# Altium PCB STM32_BalanceCar.PcbDoc (part 1 of 2)
Units mil, origin at the board's own origin, x right, y up, seen from the top; angles counter-clockwise.
Board outline 2206.41 x 3228.35 mil, 4 copper layers (Top Layer, Mid-Layer 1, Mid-Layer 2, Bottom Layer); 124 components, 106 nets, 508 pads, 271 vias.
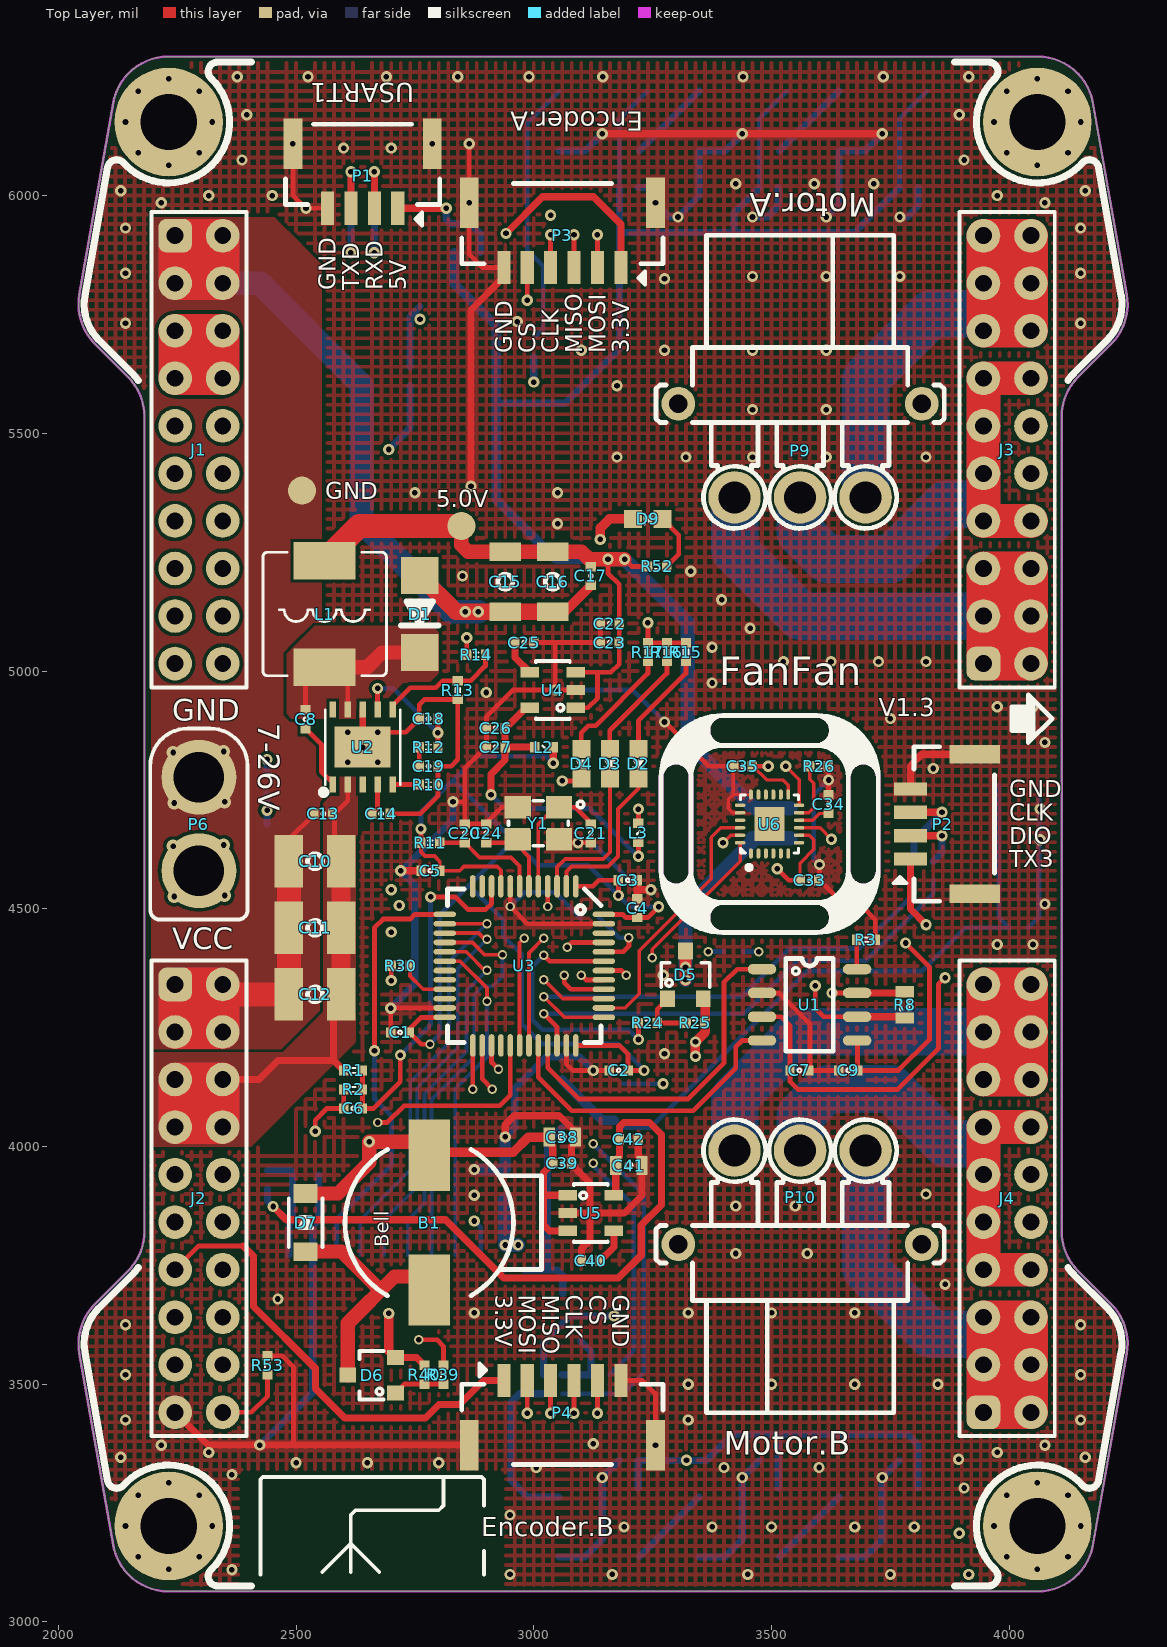
[diagram p0: Top Layer view]
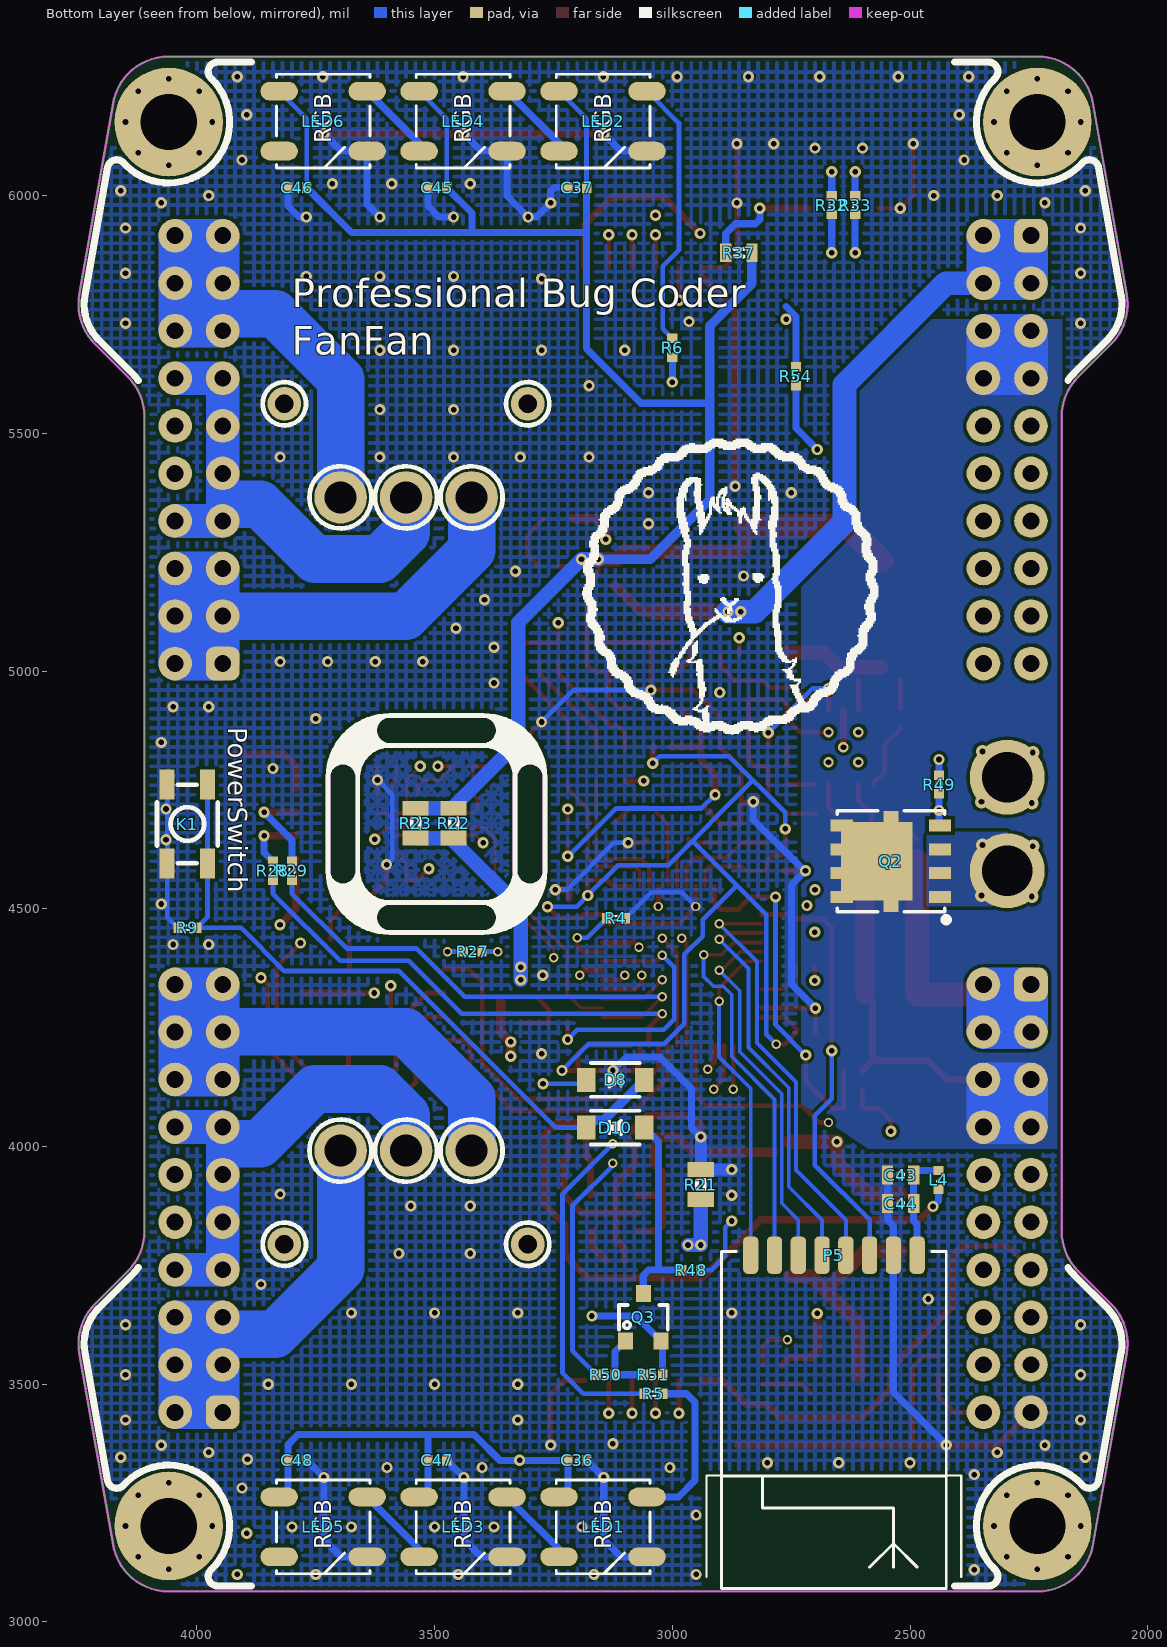
[diagram p1: Bottom Layer view, seen from below]
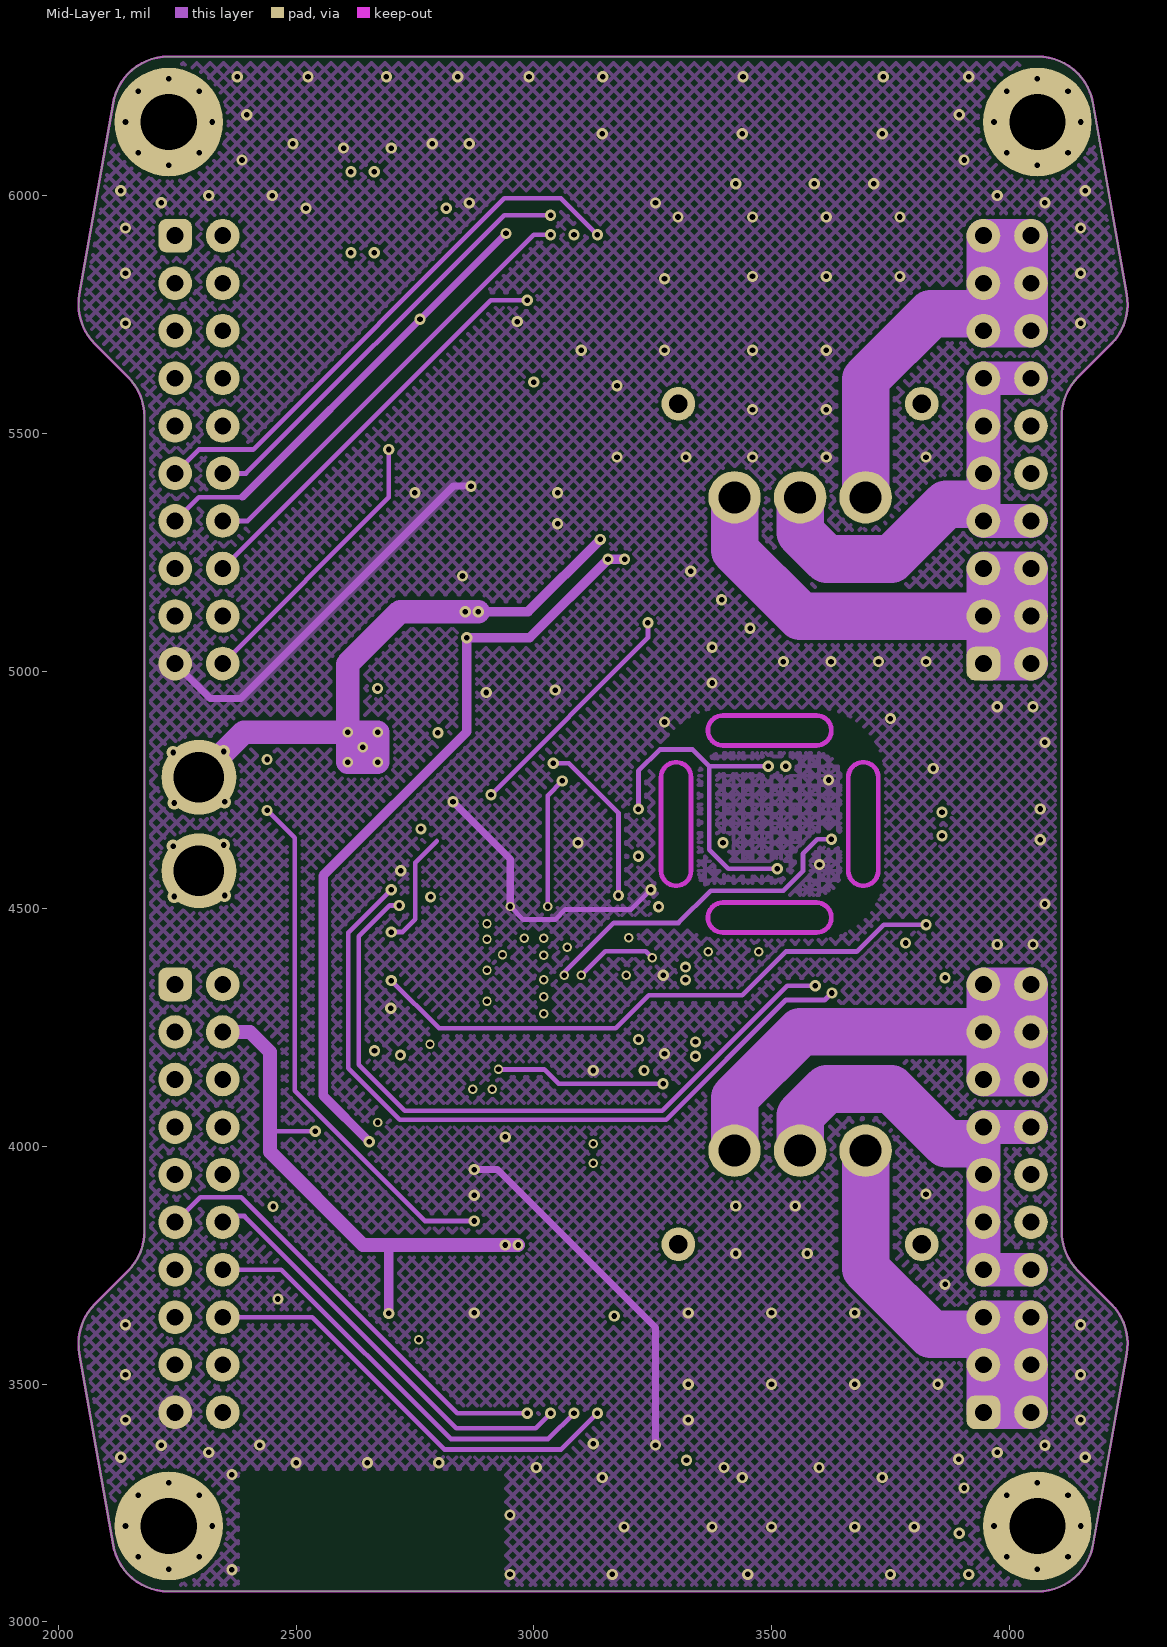
[diagram p2: Mid-Layer 1]
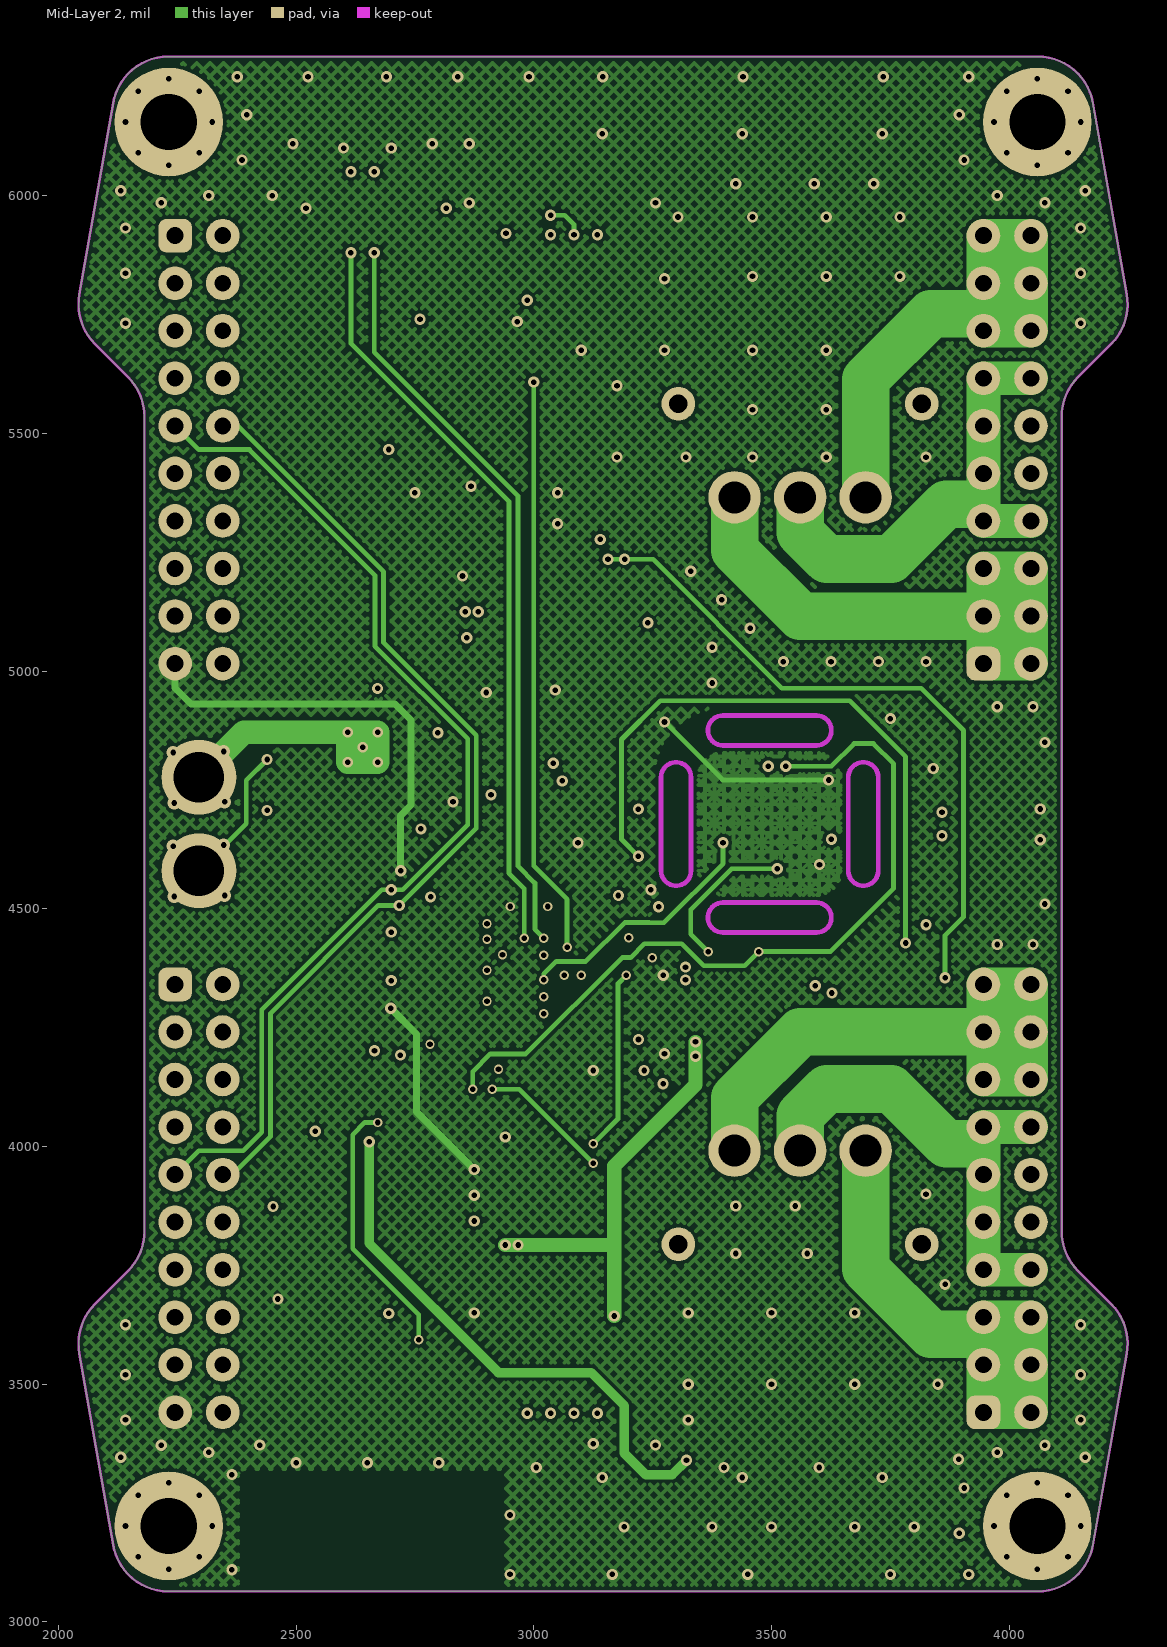
[diagram p3: Mid-Layer 2]

## Layer stack, top to bottom
Top Layer: signal copper 1.4
Dielectric: core 12.6, FR-4, Dk 4.8
Mid-Layer 1: signal copper 1.4
Dielectric: prepreg 12.6, FR-4, Dk 4.8
Mid-Layer 2: signal copper 1.4
Dielectric: core 12.6, FR-4, Dk 4.8
Bottom Layer: signal copper 1.4

## Board outline
2115.3,3161.78 2044.24,3564.75 cw(c2160.56,3585.26) 2077.04,3668.78 2146.51,3738.24 ccw(c2062.99,3821.76) 2181.1,3821.76 2181.1,5534.94 ccw(c2062.99,5534.94) 2146.51,5618.45 2077.04,5687.92 cw(c2160.56,5771.44) 2044.24,5791.95 2115.3,6194.92 cw(c2231.62,6174.41) 2231.62,6292.52 4059.73,6292.52 cw(c4059.73,6174.41) 4176.04,6194.92 4247.1,5791.95 cw(c4130.78,5771.44) 4214.3,5687.92 4144.83,5618.45 ccw(c4228.35,5534.94) 4110.24,5534.94 4110.24,3821.76 ccw(c4228.35,3821.76) 4144.83,3738.24 4214.3,3668.78 cw(c4130.78,3585.26) 4247.1,3564.75 4176.04,3161.78 cw(c4059.73,3182.28) 4059.73,3064.17 2231.62,3064.17 cw(c2231.62,3182.28)

## Design rules (kind name [scope] priority, off if disabled: settings)
Clearance [All] p1: gap=7
ComponentClearance [All] p1: gap=0 collisioncheckmode=3 verticalgap=0 showdistances=FALSE
HoleSize [All] p1: absolutevalues=TRUE maxlimit=200 minlimit=1 maxpercent=80.000 minpercent=20.000
HoleToHoleClearance [All] p1: gap=0 allowstackedmicrovias=TRUE
MinimumSolderMaskSliver [All] p1: minsoldermaskwidth=0
PolygonConnect Via [IsVia] p1: connectstyle=Direct reliefconductorwidth=10 reliefentries=4 polygonreliefangle="90 Angle"
PolygonConnect [All] p2: connectstyle=Direct reliefconductorwidth=10 reliefentries=4 polygonreliefangle="90 Angle"
RoutingVias [All] p1: holewidth=11.81 width=39.37 viastyle="Through Hole" minholewidth=3.94 minwidth=19.68 maxholewidth=264.22 maxwidth=404.33
SilkToSilkClearance [All] p1: silktosilkclearance=0
SilkscreenOverComponentPads [All] p1: minsilkscreentomaskgap=0
SolderMaskExpansion [All] p1: expansion=4
Width [All] p1: maxlimit=200 minlimit=7 preferedwidth=10
22 further rules are at their usual default settings.

## Components (designator, comment, footprint, x,y, rotation, side; value= is the part's Value field where it differs from the comment)
B1 "Bell" Bell 2780,3840 r270 top locked
C1 "100nF/50V" 0402_C 2718.68,4240 r180 top
C2 "100nF/50V" 0402_C 3178.68,4160 r180 top
C3 "100nF/50V" 0402_C 3197.68,4560 r0 top
C4 "100nF/50V" 0402_C 3217.37,4501.31 r90 top
C5 "100nF/50V" 0402_C 2782.32,4580 r0 top
C6 "100nF/50V" 0402_C 2620,4080 r0 top
C7 "100nF/50V" 0402_C 3558.68,4160 r0 top
C8 "100nF/50V" 0402_C 2520,4898.69 r90 top
C9 "100nF/50V" 0402_C 3661.32,4160 r0 top
C10 "47uF/50V" 1210_C 2540,4600 r0 top
C11 "47uF/50V" 1210_C 2540,4460 r0 top
C12 "47uF/50V" 1210_C 2540,4320 r0 top
C13 "100nF/50V" 0402_C 2557.5,4700 r0 top
C14 "10nF/50V" 0402_C 2678.68,4700 r180 top
C15 "47uF/50V" 1206_C 2940,5187.99 r90 top
C16 "47uF/50V" 1206_C 3040,5187.99 r90 top
C17 "100nF/50V" 0402_C 3120,5200 r90 top
C18 "39pF/50V" 0402_C 2778.68,4900 r0 top
C19 "6800pF/50V" 0402_C 2778.68,4800 r180 top
C20 "100nF/50V" 0402_C 2855,4658.69 r90 top
C21 "20pF" 0402_C 3120,4658.69 r270 top
C22 "2.2uF" 0402_C 3160,5100 r180 top
C23 "100nF/50V" 0402_C 3160,5060 r180 top
C24 "20pF" 0402_C 2900,4658.69 r90 top
C25 "10nF/50V" 0402_C 2980,5060 r180 top
C26 "2.2uF" 0402_C 2920,4880 r180 top
C27 "100nF/50V" 0402_C 2920,4840 r180 top
C33 "10nF/50V" 0402_C 3580,4560 r0 top
C34 "100nF/50V" 0402_C 3620,4720 r270 top
C35 "100nF/50V" 0402_C 3440,4800 r180 top
C36 "100nF" 0402_C 3200,3340 r0 bottom
C37 "100nF" 0402_C 3200,6016.7 r180 bottom
C38 "2.2uF" 0603_C 3060,4020 r180 top
C39 "100nF" 0402_C 3059.68,3965 r180 top
C40 "10nF" 0402_C 3120,3760 r0 top
C41 "2.2uF" 0603_C 3200,3960 r180 top
C42 "100nF" 0402_C 3200,4015 r180 top
C43 "10uF/50V" 0603_C 2520,3940 r180 bottom
C44 "100nF/50V" 0603_C 2520,3880 r180 bottom
C45 "100nF" 0402_C 3494.33,6016.7 r180 bottom
C46 "100nF" 0402_C 3788.66,6016.7 r180 bottom
C47 "100nF" 0402_C 3494.33,3340 r180 bottom
C48 "100nF" 0402_C 3788.66,3340 r0 bottom
D1 "SS310" DO-214-AC(SMA) 2760,5120 r90 top
D2 "0603_D-CL-0603 URC-RED" 0603_D 3220,4805 r90 top
D3 "0603_D-CL-0603 URC-RED" 0603_D 3160,4805 r90 top
D4 "0603_D-CL-0603 URC-RED" 0603_D 3100,4805 r90 top
D5 "NMOS" SOT23-3 3320,4360 r0 top
D6 "NMOS" SOT23-3 2660,3520 r90 top
D7 "1N4148" SOD-123 2520,3840 r270 top (schematic designator D5)
D8 "1N4148" SOD-123 3120,4140 r0 bottom
D9 "0603_D-CL-0603 URC-RED" 0603_D 3240,5320 r0 top
D10 "1N4148" SOD-123 3120,4040 r180 bottom
J1 "CON-2x10" CON-2x10#1 2345.67,5915.75 r180 top locked
J2 "CON-2x10" CON-2x10#1 2345.67,4340.95 r180 top locked
J3 "CON-2x10" CON-2x10#2 4045.67,5015.75 r180 top locked
J4 "CON-2x10" CON-2x10#2 4045.67,3440.95 r180 top locked
K1 "SW-PUSH-CMS" SW_3x4x2.5 4020,4678.35 r270 bottom locked (schematic designator B2)
L1 "10uH 3.5A" TMPC0603H 2560,5120 r90 top
L2 "1000R-350mA" 0402_L 3021.32,4840 r0 top
L3 "1000R-350mA" 0402_L 3220,4660 r90 top
L4 "0402_L-1000R-350mA" 0402_L 2440,3930 r90 bottom
LED1 "WS2812_5050_RGB" RGB_50X50 3145.67,3200 r90 bottom
LED2 "WS2812_5050_RGB" RGB_50X50 3145.67,6156.7 r90 bottom
LED3 "WS2812_5050_RGB" RGB_50X50 3440,3200 r90 bottom
LED4 "WS2812_5050_RGB" RGB_50X50 3440,6156.7 r90 bottom (schematic designator LED2)
LED5 "WS2812_5050_RGB" RGB_50X50 3734.33,3200 r90 bottom
LED6 "WS2812_5050_RGB" RGB_50X50 3734.33,6156.7 r90 bottom
P1 "CON" BM04B-GHS-TBT(TOP) 2640,6041.26 r0 top (schematic designator P5)
P2 "CON" BM04B-GHS-TBT(TOP) 3860,4678.35 r270 top locked (schematic designator P5)
P3 "CON" BM06B-GHS-TBT(TOP) 3060,5916.7 r0 top locked
P4 "CON" BM06B-GHS-TBT(TOP) 3060,3440 r180 top locked
P5 "CON" NRF24L01_L 2660,3740 r0 bottom locked
P6 "CON" XT30U-F 2295.67,4678.35 r90 top locked
P9 "CON" MR30PW-FB 3560,5365.35 r270 top locked
P10 "CON" MR30PW-FB 3560,3991.34 r90 top locked
Q2 "MOSFET-P" DFN5X6 2540,4600 r0 bottom
Q3 "A42" SOT23-3 3060,3640 r180 bottom
R1 "32.4K" 0402_R 2620,4160 r0 top
R2 "4.32K" 0402_R 2620,4120 r180 top
R3 "100R" 0402_R 3698.68,4435 r0 top
R4 "10K" 0402_R 3118.68,4480 r0 bottom
R5 "100R" 0402_R 3040,3480 r180 bottom
R6 "100R" 0402_R 3000,5680 r270 bottom
R8 "120R" 0603_R 3780,4298 r270 top
R9 "0R" 0402_R 4020,4460 r0 bottom
R10 "200K" 0402_R 2778.68,4761.26 r0 top
R11 "10K" 0402_R 2782.32,4639 r0 top
R12 "13K" 0402_R 2778.68,4840 r180 top
R13 "10.2K" 0402_R 2840,4960 r90 top
R14 "53.6K" 0402_R 2878.68,5034.43 r180 top
R15 "10K" 0402_R 3320,5040 r90 top
R16 "10K" 0402_R 3280,5040 r90 top
R17 "10K" 0402_R 3240,5040 r90 top
R21 "0R" 0805_R 2940,3920 r270 bottom
R22 "20R" 0805_R 3460,4680 r90 bottom
R23 "20R" 0805_R 3540,4680 r90 bottom
R24 "100R" 0402_R 3240,4260 r180 top
R25 "10K" 0402_R 3340,4260 r180 top
R26 "10K" 0402_R 3600,4800 r180 top
R27 "10K" 0402_R 3420,4410 r0 bottom
R28 "20R" 0402_R 3840,4580 r90 bottom
R29 "20R" 0402_R 3800,4580 r90 bottom
R30 "20R" 0402_R 2720,4380 r0 top
R32 "20R" 0402_R 2664.61,5980 r90 bottom
R33 "20R" 0402_R 2615.39,5980 r90 bottom
R37 "0R" 0603_R 2860,5880 r180 bottom
R39 "100R" 0402_R 2810,3520 r90 top
R40 "10K" 0402_R 2770,3520 r90 top
R48 "100R" 0402_R 2960,3740 r180 bottom
R49 "10K" 0402_R 2439,4761.31 r90 bottom
R50 "100R" 0402_R 3140,3520 r180 bottom
R51 "10K" 0402_R 3040,3520 r180 bottom
R52 "10K" 0402_R 3260,5220 r0 top
R53 "100R" 0402_R 2440,3540 r270 top
R54 "10K" 0402_R 2740,5620 r270 bottom
U1 "1042" SOP-8 3580,4300 r270 top
U2 "TPS54361DPRR" TPS54361 2640,4840 r0 top
U3 "STM32F103C8T6" LQFP-48 2980,4380 r180 top locked
U4 "XC6209F332MR-G" SOT23-5 3040,4960 r90 top
U5 "TPS71733DCKR" SOT23-5 3120,3860 r270 top
U6 "MPU6500" MPU6500 3496.06,4678.35 r0 top locked
Y1 "12MHz-12PF" XTAL_SMD_3.2X2.5_4P 3009.53,4680 r180 top

## Footprints (in the part's own frame and the unit in brackets; to place one, negate y for a bottom-side part, rotate by r counter-clockwise, add the part's x,y. Pads: shape width x height; smd on the part's side, far side on the other; paste and mask are expansions set on the pad)
0402_C [mm]
  rect 0.5x0.55 smd: 1(-0.5,0) 2(0.5,0)
  silkscreen extent -0.1,-0.1 0.1,0.1
0402_L [mm]
  rect 0.5x0.55 smd: 1(-0.5,0) 2(0.5,0)
  silkscreen extent -0.08,-0.08 0.08,0.08
0402_R [mm]
  rect 0.5x0.55 smd: 1(-0.5,0) 2(0.5,0)
  silkscreen extent -0.13,-0.13 0.13,0.13
0603_C [mm]
  rect 0.6x1 smd: 1(-0.7,0) 2(0.7,0)
  silkscreen extent -0.18,-0.18 0.18,0.18
0603_D [mil]
  rect 38x38 smd: 1(31,0) 2(-31,0)
  silkscreen extent -7,-11 7,11
0603_R [mm]
  rect 0.6x1 smd: 1(-0.7,0) 2(0.7,0)
  silkscreen extent -0.24,-0.2 0.24,0.2
0805_R [mm]
  rect 0.8x1.4 smd: 1(-0.8,0) 2(0.8,0)
  silkscreen extent -0.25,-0.2 0.25,0.2
1206_C [mm]
  rect 1x1.7 smd: 1(-1.6,0) 2(1.6,0)
  silkscreen extent -0.4,-0.4 0.4,0.4
1210_C [mil]
  rect 60x110 smd: 1(-55,0) 2(55,0)
  silkscreen extent -16,-16 16,16
Bell [mm]
  rect 3.8x2.2 smd: 1(-3.6,0) 2(3.6,0)
  silkscreen extent -3.91,-4.5 3.91,6
BM04B-GHS-TBT(TOP) [mm]
  rect 0.7x1.778 smd: 1(1.875,-1.725) 2(0.625,-1.725) 3(-0.625,-1.725) 4(-1.875,-1.725)
  rect 1x2.7 smd: 5(-3.725,1.725) 6(3.725,1.725)
  silkscreen extent -4.12,-2.64 4.13,2.77
BM06B-GHS-TBT(TOP) [mm]
  rect 0.7x1.778 smd: 1(3.125,-1.725) 2(1.875,-1.725) 3(0.625,-1.725) 4(-0.625,-1.725) 5(-1.875,-1.725) 6(-3.125,-1.725)
  rect 1x2.7 smd: 7(-4.975,1.725) 8(4.975,1.725)
  silkscreen extent -5.37,-2.64 5.38,2.77
CON-2x10#1 [mm]
  rrect50% 1.8x1.8 hole 0.9: 1(2.54,0)
  round 1.8 hole 0.9: 2(0,0) 3(2.54,2.54) 4(0,2.54) 5(2.54,5.08) 6(0,5.08) 7(2.54,7.62) 8(0,7.62) 9(2.54,10.16) 10(0,10.16) 11(2.54,12.7) 12(0,12.7) 13(2.54,15.24) 14(0,15.24) 15(2.54,17.78) 16(0,17.78) 17(2.54,20.32) 18(0,20.32) 19(2.54,22.86) 20(0,22.86)
  silkscreen extent -1.27,-1.27 3.81,24.13
CON-2x10#2 [mm]
  rrect50% 1.8x1.8 hole 0.9: 1(2.54,0)
  round 1.8 hole 0.9: 2(0,0) 3(2.54,-2.54) 4(0,-2.54) 5(2.54,-5.08) 6(0,-5.08) 7(2.54,-7.62) 8(0,-7.62) 9(2.54,-10.16) 10(0,-10.16) 11(2.54,-12.7) 12(0,-12.7) 13(2.54,-15.24) 14(0,-15.24) 15(2.54,-17.78) 16(0,-17.78) 17(2.54,-20.32) 18(0,-20.32) 19(2.54,-22.86) 20(0,-22.86)
  silkscreen extent -1.27,-24.13 3.81,1.27
DFN5X6 [mm]
  rect 1.2x0.65 smd: 1(-2.616,-1.905) 2(2.629,-1.905) 2(2.629,1.905) 2(2.629,-0.635) 2(2.629,0.635) 3(-2.616,-0.635) 3(-2.616,0.635) 3(-2.616,1.905)
  rect 0.8x1 smd: 2(0,-2.195) 2(0,2.205)
  rect 3.8x4.2 smd: 2(0.762,0)
  silkscreen extent -3.1,-2.7 2.88,3.28
DO-214-AC(SMA) [mm]
  rect 2x2 smd: 1(2.057,0) 2(-2.057,0)
  silkscreen extent -0.61,-1 0.67,1
LQFP-48 [mm]
  oval 0.3x1.2 smd: 1(-2.75,-4.25) 2(-2.25,-4.25) 3(-1.75,-4.25) 4(-1.25,-4.25) 5(-0.75,-4.25) 6(-0.25,-4.25) 7(0.25,-4.25) 8(0.75,-4.25) 9(1.25,-4.25) 10(1.75,-4.25) 11(2.25,-4.25) 12(2.75,-4.25) 25(2.75,4.25) 26(2.25,4.25) 27(1.75,4.25) 28(1.25,4.25) 29(0.75,4.25) 30(0.25,4.25) 31(-0.25,4.25) 32(-0.75,4.25) 33(-1.25,4.25) 34(-1.75,4.25) 35(-2.25,4.25) 36(-2.75,4.25)
  oval 1.2x0.3 smd: 13(4.25,-2.75) 14(4.25,-2.25) 15(4.25,-1.75) 16(4.25,-1.25) 17(4.25,-0.75) 18(4.25,-0.25) 19(4.25,0.25) 20(4.25,0.75) 21(4.25,1.25) 22(4.25,1.75) 23(4.25,2.25) 24(4.25,2.75) 37(-4.25,2.75) 38(-4.25,2.25) 39(-4.25,1.75) 40(-4.25,1.25) 41(-4.25,0.75) 42(-4.25,0.25) 43(-4.25,-0.25) 44(-4.25,-0.75) 45(-4.25,-1.25) 46(-4.25,-1.75) 47(-4.25,-2.25) 48(-4.25,-2.75)
  silkscreen extent -4.1,-4.1 4.1,4.1
MPU6500 [mm]
  oval 0.2x0.55 smd: 1(-1,-1.575) 2(-0.6,-1.575) 3(-0.2,-1.575) 4(0.2,-1.575) 5(0.6,-1.575) 6(1,-1.575) 13(1,1.575) 14(0.6,1.575) 15(0.2,1.575) 16(-0.2,1.575) 17(-0.6,1.575) 18(-1,1.575)
  oval 0.55x0.2 smd: 7(1.575,-1) 8(1.575,-0.6) 9(1.575,-0.2) 10(1.575,0.2) 11(1.575,0.6) 12(1.575,1) 19(-1.575,1) 20(-1.575,0.6) 21(-1.575,0.2) 22(-1.575,-0.2) 23(-1.575,-0.6) 24(-1.575,-1)
  rect 1.6x1.8 smd: 25(0,0)
  silkscreen extent -1.55,-1.55 1.55,1.55
MR30PW-FB [mm]
  round 1.8 hole 1: 0(-5,6.5) 0(-5,-6.5)
  round 2.8 hole 1.7: 1(0,-3.5) 2(0,0) 3(0,3.5)
  silkscreen extent -14,-7.7 -1.4,7.7
NRF24L01_L [mm]
  rrect60% 0.813x2 smd: 1(-4.445,-0.8) 2(-3.175,-0.8) 3(-1.905,-0.8) 4(-0.635,-0.8) 5(0.635,-0.8) 6(1.905,-0.8) 7(3.175,-0.8) 8(4.445,-0.8)
  silkscreen extent -6,-1 6,17
RGB_50X50 [mm]
  oval 1x2 smd: 1(-1.6,-2.35) 2(1.6,-2.35) 3(1.6,2.35) 4(-1.6,2.35)
  silkscreen extent -2.5,-2.5 2.5,2.5
SOD-123 [mm]
  rect 1x1.3 smd: 1(1.55,0) 2(-1.55,0)
  silkscreen extent -1.3,-0.9 1.3,0.9
SOP-8 [mil]
  oval 22x60 smd: 1(-73,-100) 2(-23,-100) 3(27,-100) 4(77,-100) 5(77,100) 6(27,100) 7(-23,100) 8(-73,100)
  silkscreen extent -96,-50 100,50
SOT23-3 [mm]
  rect 0.8x0.9 smd: 1(-0.975,-1.25) 2(0.925,-1.25) 3(-0.025,1.3)
  silkscreen extent -1.33,-0.62 1.27,0.68
SOT23-5 [mm]
  rect 0.55x1 smd: 1(-0.95,-1.23) 2(0,-1.23) 3(0.95,-1.23) 4(0.95,1.23) 5(-0.95,1.23)
  silkscreen extent -1.55,-0.9 1.55,0.9
SW_3x4x2.5 [mm]
  rect 1.6x0.8 smd: 1(-2.1,-1.075) 2(2.1,-1.075) 3(2.1,1.075) 4(-2.1,1.075)
  silkscreen extent -2.1,-1.63 2.1,1.63
TMPC0603H [mm]
  rect 2x3.3 smd: 1(-2.85,0) 2(2.85,0)
  silkscreen extent -3.3,-3.3 3.3,3.3
TPS54361 [mm]
  rect 3x2.2 smd: 0(0,0)
  rect 0.35x0.85 smd: 1(-1.6,-2) 2(-0.8,-2) 3(0,-2) 4(0.8,-2) 5(1.6,-2) 6(1.6,2) 7(0.8,2) 8(0,2) 9(-0.8,2) 10(-1.6,2)
  silkscreen extent -2.16,-2.54 2,2
XT30U-F [mm]
  round 4 hole 2.7: 1(-2.5,0) 2(2.5,0)
  silkscreen extent -5.1,-2.6 5.1,2.6
XTAL_SMD_3.2X2.5_4P [mm]
  rect 1.4x1.2 smd: 1(-1.1,-0.85) 2(1.1,-0.85) 3(1.1,0.85) 4(-1.1,0.85)
  silkscreen extent -2.43,-1.2 1.6,1.2

## Part data
C1 C2 C3 C4 C5 C6 C7 C8 C9 C10 C11 C12 C13 C14 C15 C16 C17 C18 C19 C20 C21 C22 C23 C24 C25 C26 C27 C33 C34 C35 C36 C37 C38 C39 C40 C41 C42 C43 C44 C45 C46 C47 C48: library part Cap, "Capacitor"
D1: library part "Diode Schottky", "Diode Schottky"
D2 D3 D4 D9: library part LED, "LED"
D5 D6: library part MOSFET
D7 D8 D10: "Diode"
K1: library part MCD-00002, "Non-Open Push-Button 0.1A 24V"
L1 L2 L3 L4: library part Inductor, "Inductor"
P1 P2: library part CON-4
P3 P4: library part CON-6
P5: library part CON-8
P6 P9 P10: library part CON-3
Q2: "P-Channel MOSFET"
R1 R2 R3 R4 R5 R6 R8 R9 R10 R11 R12 R13 R14 R15 R16 R17 R21 R22 R23 R24 R25 R26 R27 R28 R29 R30 R32 R33 R39 R40 R48 R49 R50 R51 R52 R53 R54: library part Res2, "Resistor"
R37: library part Res, "Resistor"
U1: library part MAX3051
U2: library part TPS54361
U3: library part STM32F103CBT6
U4: library part XC6228D332VR-G
U5: "Imported"
Y1: library part XTAL-4P, "XTAL-4P"

## Free pads (board coordinates)
  round 228.35 hole 118.11: 0(2232.28,3201.97) 0(2232.28,6154.73) 0(4059.06,3201.97) 0(4059.06,6154.73)
  round 23.62 hole 11.81: 0(2232.28,3110.87) 0(2232.28,6245.83) 0(4059.06,3110.87) 0(4059.06,6245.83) 1(2167.87,3137.55) 1(2167.87,6219.15) 1(4123.48,3137.55) 1(4123.48,6219.15) 2(2141.18,3201.97) 2(2141.18,6154.73) 2(4150.16,3201.97) 2(4150.16,6154.73) 3(2167.86,3266.39) 3(2167.86,6090.31) 3(4123.48,3266.39) 3(4123.48,6090.31) 4(2232.28,3293.07) 4(2232.28,6063.62) 4(4059.06,3293.07) 4(4059.06,6063.62) 5(2296.7,3266.39) 5(2296.7,6090.31) 5(3994.64,3266.39) 5(3994.64,6090.31) 6(2323.39,3201.97) 6(2323.39,6154.73) 6(3967.95,3201.97) 6(3967.95,6154.73) 7(2296.7,3137.55) 7(2296.7,6219.15) 7(3994.64,3137.55) 7(3994.64,6219.15)
  round 59.06 smd: 1(2512.35,5379.54) 1(2847.59,5305)

## Via types
v1: diameter 23.62, hole 11.81, Top Layer to Bottom Layer, tented both sides, 229 vias
v2: diameter 19.68, hole 11.81, Top Layer to Bottom Layer, tented both sides, 29 vias
v3: diameter 27.56, hole 11.81, Top Layer to Bottom Layer, tented both sides, 8 vias
v4: diameter 22, hole 12, Top Layer to Bottom Layer, tented both sides, 5 vias

## Nets (pads, with @x,y where several pads share a name; then routed paths per layer and width w, separated by ;. In a path a pad name is that pad's centre, name@x,y a point inside that pad or via, vN(x,y) a via of type N, cw(c..) or ccw(c..) an arc to the next point about the centre after c; other vN are vias at no path point)
B_PWM: R39.2 U3.29 | length 1057.8
  Top Layer w10: v2(2671.44,4050.63) 2691.83,4050.63 2727.21,4086.01 2928.48,4086.01 2950.56,4108.09 U3.29@2950.56,4212.96 ; v2(2757.88,3593.53) 2796.55,3593.53 2810,3580.08 R39.2@2810,3539.68
  Mid-Layer 2 w10: v2(2671.44,4050.63) 2644.8,4050.63 2619.01,4024.85 2619.01,3785.34 2757.88,3646.47 v2(2757.88,3593.53)
BAT+: P6.1 Q2.3 R49.2 | length 326.4
  Mid-Layer 2 w10: P6.1@2295.67,4579.92 2395,4679.25 2395,4770 v1(2439,4814)
  Bottom Layer w15: R49.2@2439,4781 v1(2439,4814)
  other v3: 2243.75,4525.78 2349.82,4528 2241.52,4631.84 2347.59,4634.07
CAN_H: J1.9 J2.9 R8.1 U1.7 | length 3963.1
  Top Layer w10: v1(3627,4323) U1.7@3680,4323
  Top Layer w15: U1.7@3680,4323 R8.1@3778,4323
  Mid-Layer 1 w10: v1(2700,4540) 2610,4450 2610,4165 2718.52,4056.48 3278.11,4056.48 3529.8,4308.18 3612.18,4308.18 v1(3627,4323)
  Mid-Layer 2 w10: J2.9@2245.67,3940.95 2295.67,3990.95 2389,3990.95 2428,4029.95 2428,4288 2680,4540 2724.54,4540 2861.04,4676.49 2861.04,4857.51 2666,5052.54 2666,5201.54 2401.79,5465.75 2295.67,5465.75 J1.9@2245.67,5515.75
CAN_L: J1.10 J2.10 R8.2 U1.6 | length 3778.8
  Top Layer w10: v1(3592.16,4338.03) 3592.16,4290.84 3610,4273 U1.6@3680,4273
  Top Layer w15: U1.6@3680,4273 R8.2@3774,4273
  Mid-Layer 1 w10: v1(2717,4507) 2697,4507 2632,4442 2632,4172.04 2728.63,4075.41 3270.41,4075.41 3533.03,4338.03 v1(3592.16,4338.03)
  Mid-Layer 2 w10: J1.10@2345.67,5515.75 2377.25,5515.75 2684,5209 2684,5060 2879.04,4864.96 2879.04,4669.04 v1(2717,4507) 2673.29,4507 2446,4279.71 2446,4020.96 J2.10@2366.56,3941.53
CAN_RX: U1.4 U3.32 | length 654.5
  Top Layer w10: U3.32@3009.53,4212.68 3009.53,4145.47 3080,4075 3335,4075 3425,4165 3425,4210 3438,4223 U1.4@3480,4223
CAN_TX: U1.1 U3.33 | length 737.6
  Top Layer w10: U3.33@3029.21,4212.68 3029.21,4165.79 3095,4100 3325,4100 3400,4175 3400,4345 3428,4373 U1.1@3480,4373
CE: P5.3 U3.13 | length 910.7
  Top Layer w10: v1(2664.91,4201.48) 2664.91,4460.3 2683.03,4478.41 2740.21,4478.41 2750.06,4488.27 U3.13@2812.68,4488.27
  Bottom Layer w10: P5.3@2585,3771.5 2585,3845.53 2700.48,3961.01 2700.48,4064.52 2664.91,4100.08 v1(2664.91,4201.48)
CS: P5.4 U3.14 | length 896.4
  Top Layer w8: U3.14@2812.68,4468.58 v2(2901.54,4468.58)
  Bottom Layer w8: P5.4@2635,3771.5 2635,3845.53 2740,3950.53 2740,4135.98 2821.86,4217.84 2821.86,4388.9 v2(2901.54,4468.58)
DC_3.3V: C9.2 C26.1 C27.1 L2.1 L3.1 R15.2 R16.2 R17.2 U1.5 U4.5 | length 3083.7
  Top Layer w10: v1(3220,4610.31) L3.1@3220,4640.31 ; v1(3240,5101.77) R17.2@3240,5059.69 R15.2@3320,5059.69 ; U1.5@3681,4222 C9.2@3681,4160 3767,4160 3832,4225 3832,4378 v1(3782,4428)
  Top Layer w15: v1(2910,4740) 2910,4783 2939.68,4812.69 C26.1@2939.68,4880 ; C27.1@2939.68,4840 L2.1@3001.63,4840 ; C26.1@2941,4880 U4.5@2980.5,4919.5
  Mid-Layer 1 w10: v1(2910,4740) 3240,5070 v1(3240,5101.77)
  Mid-Layer 2 w10: v1(3220,4610.31) 3184.46,4645.85 3184.46,4856.07 3265.8,4937.4 3664.65,4937.4 3782,4820.05 v1(3782,4428)
  Bottom Layer w10: v1(2910,4740) 2939,4711 3118,4711 v1@3222,4607
DGND: C1.2 C2.2 C3.2 C4.2 C5.1 C7.2 C9.1 C20.2 C21.2 C22.2 C23.2 C24.2 C25.1 C26.2 C27.2 C33.2 C34.1 C35.2 C36.1 C37.1 C38.1 C39.1 C40.1 C41.1 C42.1 C43.1 C44.1 C45.1 C46.1 C47.2 C48.1 J1.19 J2.19 K1.1 K1.2 LED1.1 LED2.1 LED3.1 LED4.1 LED5.1 LED6.1 P1.4 P1.5 P1.6 P2.4 P2.5 P2.6 P3.6 P3.7 P3.8 P4.6 P4.7 P4.8 P5.2 R3.2 R4.1 R9.2 R21.1 R26.1 R53.1 U1.2 U3.8 U3.23 U3.35 U3.47 U4.2 U5.2 U6.18 U6.20 Y1.2 Y1.4 | length 14567.5
  Top Layer w7: C35.2@3419,4800 3419.36,4799.64 3419.36,4740.36 ; U6.20@3434.06,4701.97 3418.03,4701.97 3409,4711 3409,4730 3419.36,4740.36 ; U6.18@3456.69,4740.36 3419.36,4740.36
  Top Layer w10: R53.1@2440,3559.68 2470.7,3559.68 2494.62,3535.76 2494.62,3380 ; v1(2493.35,6109.17) 2493.35,6000.82 v1(2520.82,5973.35) P1.4@2566.18,5973.35 ; C1.2@2699,4240 v1(2699,4291) 2699.42,4291.42 U3.23@2812.68,4291.42 U3.23@2813.46,4292.2 ; v1(2830,4725) 2855,4725 ; v1(2864.13,5984.61) 2864.13,5876.26 2891.61,5848.78 P3.6@2936.97,5848.78 P3.6@2936.97,5828.67 ; P3.7@2864.13,6000.82 v1(2864.13,6109.17) ; C27.2@2899,4840 2855,4796 C20.2@2855,4678.37 C24.2@2900,4678.37 ; C24.2@2900,4681 2932.46,4713.46 Y1.2@2966.22,4713.46 ; C27.2@2900.32,4840 2900.32,4904.31 2956,4960 v1(3045,4960) ; U3.8@2950.47,4547.32 v2(2950.47,4504.84) 2986.73,4468.58 U3.47@3147.32,4468.58 ; C25.1@2999.68,5060 C23.2@3140.32,5060 C22.2@3140.32,5100 ; 3045,5060 v1(3045,4960) ; Y1.4@3052.84,4646.54 3060.37,4639 C21.2@3120,4639 ; U3.35@3068.58,4212.68 3068.58,4173.36 3081.95,4160 C2.2@3159,4160 ; U4.2@3088.43,4960 v1(3045,4960) ; P4.6@3183.03,3507.91 3228.39,3507.91 3255.87,3480.44 v1(3255.87,3372.09) ; v1(3275,4893) 3368,4800 C35.2@3419,4800 ; U1.2@3480,4323 3515,4323 3581,4257 3581,4160 C9.1@3641.63,4160 ; v1(3601,4593) 3601,4560 3654.73,4506.27 3689.56,4506.27 3718.37,4477.46 R3.2@3718.37,4435 ; C34.1@3620,4741 R26.1@3620,4799
  Top Layer w15: J2.19@2245.67,3440.95 2314.53,3372.09 P4.8@2864.13,3372.09 ; v1(2720,4580) C5.1@2762.63,4580 ; v1(2867.91,5388.91) 2867.91,5759.61 P3.6@2936.97,5828.67 ; v1(2940,4020.3) 2940,4045.95 2959.01,4064.96 3052.79,4064.96 C38.1@3086.47,4031.29 ; U5.2@3071.57,3860 3118.08,3860 ; C39.1@3076.64,3965 3118.08,3923.56 3118.08,3860 ; C39.1@3079.37,3965 3079.37,4000.58 C38.1@3090.11,4011.32 ; C40.1@3100.32,3760 3100.32,3784.95 3118.08,3802.72 3118.08,3860 ; v1(3144.08,6130.16) v1(3732.74,6130.16) ; C4.2@3217.37,4521 C3.2@3217.37,4560 ; 3217.37,4541.23 3218.6,4540 v1(3246.37,4540) ; C42.1@3219.68,4020 3219.68,3979.42 C41.1@3230.43,3968.68 ; C41.1@3227.56,3960 3227.56,3896.81 3190.75,3860 3118.08,3860 ; P2.4@3792.09,4752.17 3792.09,4801.11 3815.98,4825 P2.5@3927.91,4825
  Mid-Layer 1 w10: v2(2950.47,4504.84) 2977.96,4477.35 3045.05,4477.35 3066.38,4498.67 3205.04,4498.67 v1(3246.37,4540)
  Mid-Layer 1 w15: J1.19@2245.67,5015.75 2319.42,4942 2383.68,4942 2830.59,5388.91 v1(2867.91,5388.91) ; v1(2830,4725) 2950.47,4604.53 v2(2950.47,4504.84) ; v1(2874.91,3951.5) 2923.5,3951.5 3255.87,3619.13 v1(3255.87,3372.09)
  Mid-Layer 2 w10: v1(3275,4893) 3397,4771 v1(3620,4771)
  Mid-Layer 2 w15: J1.19@2245.67,5015.75 2245.67,4964.33 2279,4931 2708,4931 2742,4897 2742,4718 2720,4696 v1(2720,4580) ; v1(2699,4291) 2753.43,4236.57 2753.43,4072.97 v1(2874.91,3951.5)
  Bottom Layer w10: v2(2950.47,4504.84) 2980.63,4535 3044,4535 R4.1@3099,4480 ; v1(3045,4960) 3208,4960 v1(3275,4893) ; v1(3093,4639) 3122.93,4639 3221.39,4540.54 v1@3249,4540.54 ; v1(3601,4593) 3589,4605 3589,4740 v1(3620,4771) ; R9.2@4039.68,4460 4062.32,4482.64 K1.1@4062.32,4761.03
  Bottom Layer w15: v1(2423.84,3372.09) 2535,3483.25 P5.2@2535,3771.5 2535,3832.67 2547.56,3845.23 C43.1@2547.56,3940 ; v1(2699,4291) 2749.66,4341.66 2749.66,4550.34 v1(2720,4580) 2722,4580 2830,4688 v1(2830,4725) ; v1(2940,4020.3) 2960,4040.3 2960,4122 3026.32,4188.32 3096.68,4188.32 v1(3125,4160) ; LED1.1@3053.15,3137.01 3107.62,3137.01 3144.08,3173.46 v1(3144.08,3303.76) C36.1@3180.32,3340 ; LED2.1@3053.15,6093.7 3107.62,6093.7 v1(3144.08,6130.16) ; C37.1@3219.68,6016.7 3247.9,6016.7 3255.87,6008.73 v1(3255.87,5984.61) 3285.48,5955 v1(3303.3,5955) 3347.48,5999.18 LED4.1@3347.48,6093.7 3401.95,6093.7 v1(3438.41,6130.16) ; LED3.1@3347.48,3137.01 3401.95,3137.01 3438.41,3173.46 v1(3438.41,3303.76) C47.2@3474.65,3340 ; v1(3460,5955) 3491.08,5955 3514.02,5977.93 C45.1@3514.02,6016.7 ; v1(3615,5955) 3641.81,5981.81 LED6.1@3641.81,6093.7 3696.28,6093.7 v1(3732.74,6130.16) ; LED5.1@3641.81,3137.01 3696.28,3137.01 3732.74,3173.46 v1(3732.74,3303.76) C48.1@3768.98,3340 ; v1(3770,5955) 3785.49,5955 3808.35,5977.85 C46.1@3808.35,6016.7
  Bottom Layer w25: v1(2874.91,3951.5) R21.1@2940,3951.5 v1(2940,4020.3)
  other v1: 2950,3100 3165,3100 3450,3100 3750,3100 2365,3110 3190,3200 3375,3200 3500,3200 3675,3200 3800,3200 2950,3225 3905,3281.7 2365,3310 3005,3325 3400,3325 3600,3325 2500,3335 2650,3335 2800,3335 3893.53,3342.44 2131.34,3346.7 4160,3346.7 2316.34,3356.7 3975,3356.7 2216.34,3371.7 4075,3371.7 3125,3375 2141.34,3425 3325,3425 4150,3425 3325,3500 3500,3500 3675,3500 3850,3500 2141.34,3520 4150,3520 2141.34,3625 4150,3625 2875,3650 3325,3650 3500,3650 3675,3650 2461.84,3679.37 3865,3710 3425,3775 3575,3775 3425,3875 3550,3875 2874.91,3897.46 3825,3900 3275,4195 3272.35,4360.31 3975,4425 4050,4425 4075,4510 4065,4645 4065,4710 3840,4795 4075,4850 3750,4900 3975,4925 4050,4925 2900,4955 3375,4975 3525,5020 3625,5020 3725,5020 3825,5020 3375,5050 3455,5090 3395,5150 2850,5200 3330,5210 3050,5310 2750,5375 3050,5375 3175,5450 3320,5450 3460,5450 3615,5450 3825,5450 3460,5550 3615,5550 3175,5600 3100,5675 3275,5675 3460,5675 3615,5675 2141.34,5731.7 4150,5731.7 2965,5735 3275,5825 3460,5830 3615,5830 3770,5830 2141.34,5836.7 4150,5836.7 2141.34,5931.7 4150,5931.7 2216.34,5985 4075,5985 2316.34,6000 2450,6000 3975,6000 2131.34,6010 4160,6010 3425,6025 3590,6025 3715,6025 2386.34,6075 3905,6075 2600,6100 2700,6100 2786.65,6109.17 2396.34,6170 3895,6170 2376.34,6250 2525,6250 2690,6250 2840,6250 2990,6250 3145,6250 3440,6250 3735,6250 3915,6250
EN_GATE: U3.20
IRQ: P5.8 U3.18 | length 701.6
  Top Layer w8: U3.18@2812.68,4389.84 2844.99,4389.84 2901.54,4333.29 v2(2901.54,4305.67)
  Bottom Layer w8: P5.8@2835,3771.5 2835,4122.03 2901.54,4188.57 v2(2901.54,4305.67)
K1: D10.1 Q3.3 R48.1 | length 436.1
  Bottom Layer w15: R48.1@2979.68,3740 3050,3740 3061,3729 Q3.3@3061,3691.2 ; 3029,3740 3029,4010.03 D10.1@3058.98,4040
KEY_A: D8.1 U3.27 | length 499.8
  Top Layer w10: U3.27@2911.1,4212.68 2911.1,4176.81 v2(2925.7,4162.2)
  Mid-Layer 1 w10: v2(2925.7,4162.2) 3021.89,4162.2 3052.09,4132 v1(3272,4132)
  Bottom Layer w10: D8.1@3187.5,4132 v1(3272,4132)
LED_BLUE: D4.2 U3.4 | length 359.4
  Top Layer w10: v2(3029.21,4504.84) U3.4@3029.21,4547.32 ; v1(3060,4769) D4.2@3100,4769
  Mid-Layer 1 w10: v2(3029.21,4504.84) 3029.21,4738.21 v1(3060,4769)
LED_GRE: D3.2 U3.3 | length 314.6
  Top Layer w8: U3.3@3048.9,4547.32 3049,4547.43 3049,4588 3066,4605 3146,4605 3160,4619 D3.2@3160,4769
LED_RED: D2.2 U3.2 | length 329.5
  Top Layer w8: U3.2@3068.58,4547.32 3068.58,4578.58 3079,4589 3156,4589 3177,4610 3177,4710 3220,4753 D2.2@3220,4769
M1_HALL_A: J1.20 R54.2 | length 747.9
  Mid-Layer 1 w10: J1.20@2345.67,5015.75 2695,5365.08 v1(2695,5466)
  Bottom Layer w15: v1(2695,5466) 2740,5511 R54.2@2740,5600.31
M1_HALL_B: J1.18
M2_HALL_A: J2.20 R53.2 | length 153.8
  Top Layer w10: J2.20@2345.67,3440.95 2405.95,3440.95 2440,3475 R53.2@2440,3520.32
M2_HALL_B: J2.18
MISO: P5.7 U3.16 | length 838
  Top Layer w8: U3.16@2812.68,4429.21 2870.79,4429.21 2896.58,4403.42 v2(2934.12,4403.42)
  Bottom Layer w8: P5.7@2785,3771.5 2785,4099.15 2874.95,4189.09 2874.95,4319.34 2892.74,4337.13 2913.5,4337.13 2934.12,4357.76 v2(2934.12,4403.42)
MOSI: P5.6 U3.17 | length 774.2
  Top Layer w8: U3.17@2812.68,4409.53 2857.89,4409.53 v2@2900.8,4366.62
  Bottom Layer w8: P5.6@2735,3771.5 2735,3845.53 2770,3880.53 2770,4111.12 2858.31,4199.43 2858.31,4327.6 v2(2901.54,4370.83)
MPU6500_INT: R27.2 U3.25 U6.12 | length 1865.5
  Top Layer w7: v1(3530,4800) 3558.07,4771.93 U6.12@3558.07,4717.72
  Top Layer w10: v2(2871.73,4120.62) U3.25@2871.73,4212.68
  Mid-Layer 2 w10: v2(2871.73,4120.62) 2871.73,4157.78 2908.8,4194.85 2983.32,4194.85 3186.03,4397.55 3203.55,4397.55 3232.59,4426.6 3311.28,4426.6 3357.52,4380.35 3443.2,4380.35 v2(3472.85,4410) 3624,4410 3756.74,4542.74 3756.74,4805.26 3714.45,4847.55 3673.55,4847.55 3626,4800 v1(3530,4800)
  Bottom Layer w10: R27.2@3439.68,4410 v2(3472.85,4410)
MPU_VCC: C33.1 C35.1 L3.2 R27.1 U6.8 U6.13 | length 1429.8
  Top Layer w7: C35.1@3461,4800 3490,4771 3524,4771 3535.43,4759.57 U6.13@3535.43,4740.36 ; C33.1@3559.99,4568.75 3559.99,4595.99 3589,4625 3589,4645 3579.27,4654.73
  Top Layer w7.5: U6.8@3558.07,4654.73 3579.27,4654.73
  Top Layer w10: L3.2@3220,4679.69 v1(3220,4709.69) ; C35.1@3461,4800 v1(3493,4800) ; v1(3512,4584) 3536,4560 C33.1@3560.32,4560
  Mid-Layer 1 w10: v1(3220,4709.69) 3220,4790 3265,4835 3334,4835 3369,4800 ; v1(3493,4800) 3369,4800 ; v1(3512,4584) 3409,4584 3369,4624 3369,4800
  Mid-Layer 2 w10: v2(3367.15,4410) 3330.36,4446.79 3330.36,4498.36 3416,4584 v1(3512,4584)
  Bottom Layer w10: v2(3367.15,4410) R27.1@3400.32,4410
NetB1_2: B1.2 D6.3 D7.1 | length 480.1
  Top Layer w30: D7.1@2520,3778.98 2595.59,3778.98 2674.48,3700.09 ; D6.3@2608.8,3519 2608.8,3628.32 2707.04,3726.55 B1.2@2751.71,3726.55
NetC8_1: C8.1 U2.1 | length 140.3
  Top Layer w10: C8.1@2520,4879 2553.24,4845.76 2553.24,4788.54 U2.1@2578.76,4763.02
NetC8_2: C8.2 D1.2 L1.1 U2.9 | length 335.2
  Top Layer w10: C8.2@2520,4921 L1.1@2520,4981 ; U2.9@2608.5,4918.74 L1.1@2608.5,4981
  Top Layer w30: L1.1@2560,5007.8 2649.8,5007.8 2681,5039 D1.2@2760,5039
NetC14_2: C14.2 U2.4 | length 66.4
  Top Layer w10: C14.2@2659,4700 2671.5,4712.5 U2.4@2671.5,4761.26
NetC18_2: C18.2 R12.1 U2.7 | length 270.3
  Top Layer w10: U2.7@2671.5,4918.74 v1(2671.5,4963.5) ; R12.1@2798.37,4840 C18.2@2798.37,4900
  Bottom Layer w10: v1(2671.5,4963.5) 2704.91,4963.5 v1(2798.37,4870.03)
NetC19_2: C19.2 R12.2 | length 40
  Top Layer w10: C19.2@2759,4800 R12.2@2759,4840
NetC25_2: C25.2 U4.4 | length 75.5
  Top Layer w15: C25.2@2960.32,5060 2960.32,5028.66 U4.4@2991.57,4997.4
NetC34_2: C34.2 U6.10 | length 67.8
  Top Layer w7: U6.10@3558.07,4686.22 3586.22,4686.22 3600.32,4700.31 C34.2@3620,4700.31
NetC40_2: C40.2 U5.4 | length 74.5
  Top Layer w15: C40.2@3139.68,3760 3168.43,3788.74 U5.4@3168.43,3822.6
NetC41_2: C41.2 C42.2 L4.1 U5.5 | length 1411
  Top Layer w15: v1(2451.76,3873.82) 2479.54,3846.05 2814.03,3846.05 2936.24,3723.83 3178.4,3723.83 3225.94,3771.36 3225.94,3834.62 3268.37,3877.06 3268.37,4025.24 3243.17,4050.45 3189.11,4050.45 3180.32,4041.65 3180.32,3979.42 C41.2@3169.57,3968.68 ; U5.5@3172.44,3897.4 C41.2@3172.44,3960
  Bottom Layer w15: L4.1@2440,3910.32 2440,3885.58 v1(2451.76,3873.82)
NetC43_2: C43.2 C44.2 L4.2 P5.1 | length 222.4
  Bottom Layer w15: L4.2@2440,3949.68 C43.2@2490.77,3949.68 ; P5.1@2485,3771.5 2485,3836.39 2492.44,3843.83 C44.2@2492.44,3880 C43.2@2492.44,3940
NetD2_1: D2.1 R15.1 | length 225.7
  Top Layer w10: D2.1@3220,4836 3220,4895 3320,4995 R15.1@3320,5020.31
NetD3_1: D3.1 R16.1 | length 234
  Top Layer w10: D3.1@3160,4836 3160,4875 3280,4995 R16.1@3280,5020.31
NetD4_1: D4.1 R17.1 | length 251.1
  Top Layer w10: D4.1@3100,4836 3100,4870 3115,4885 3130,4885 3240,4995 R17.1@3240,5020.31
NetD5_1: D5.1 R24.1 R25.2 | length 117.9
  Top Layer w10: R24.1@3259.68,4260 3259.68,4288.89 D5.1@3281.6,4310.8 ; R24.1@3261,4260 R25.2@3319,4260
NetD5_3: D5.3 R22.1 R23.1 | length 490.8
  Top Layer w25: v1(3319,4350.39) D5.3@3319,4411.2
  Bottom Layer w30: v1(3319,4350.39) 3319,4501 R22.1@3460,4642 ; R22.1@3460,4648.5 R23.1@3540,4648.5
  other v1: 3319,4377.39
NetD6_1: D6.1 R39.1 R40.1 | length 108.6
  Top Layer w10: D6.1@2709.2,3481.6 2727.91,3500.32 R39.1@2810,3500.32
NetD8_2: D8.2 D10.2 K1.3 K1.4 R9.1 | length 1448.8
  Bottom Layer w10: D10.2@3181.02,4040 3245.11,4040 3574.22,4369.11 3816.25,4369.11 3907.14,4460 R9.1@4000.32,4460 3977.68,4482.64 K1.3@3977.68,4595.67 K1.4@3977.68,4761.03
  Bottom Layer w20: D8.2@3058.98,4140 3143.53,4055.45 D10.2@3169.1,4055.45
NetD9_1: D9.1 R52.2 | length 124.6
  Top Layer w10: D9.1@3271,5320 3305,5286 3305,5245.31 R52.2@3279.68,5220
NetLED1_2: LED1.2 R5.2 | length 355.4
  Bottom Layer w15: R5.2@3020.32,3480 2969.95,3480 2952.06,3462.12 2952.06,3297.94 2987.01,3262.99 LED1.2@3053.15,3262.99
NetLED1_4: LED1.4 LED3.2 | length 177.2
  Bottom Layer w15: LED1.4@3222.18,3137.69 LED3.2@3347.48,3262.99
NetLED2_2: LED2.2 R6.1 | length 570.1
  Bottom Layer w10: R6.1@3000,5699.69 3020.06,5719.75 3020.06,5851.11 2986.13,5885.05 2986.13,6152.67 LED2.2@3053.15,6219.69
NetLED2_4: LED2.4 LED4.2 | length 177.2
  Bottom Layer w15: LED2.4@3222.18,6094.39 LED4.2@3347.48,6219.69
NetLED3_4: LED3.4 LED5.2 | length 177.2
  Bottom Layer w15: LED3.4@3516.51,3137.69 LED5.2@3641.81,3262.99
NetLED4_4: LED4.4 LED6.2 | length 177.2
  Bottom Layer w15: LED4.4@3516.51,6094.39 LED6.2@3641.81,6219.69
NetP1_1: P1.1 R37.1 | length 261.8
  Top Layer w15: P1.1@2713.82,5973.35 v1(2815.91,5973.35)
  Bottom Layer w15: v1(2815.91,5973.35) 2815.91,5949.99 2825.22,5940.69 2867.32,5940.69 2887.56,5920.45 R37.1@2887.56,5880 R37.1@2887.56,5892.04
NetP1_2: P1.2 R32.2 | length 126.1
  Top Layer w15: P1.2@2664.61,5973.35 v1(2664.61,6050.22)
  Bottom Layer w15: R32.2@2664.61,6001 v1(2664.61,6050.22)
NetP1_3: P1.3 R33.2 | length 126.1
  Top Layer w15: P1.3@2615.39,5973.35 v1(2615.39,6050.22)
  Bottom Layer w15: R33.2@2615.39,6001 v1(2615.39,6050.22)
NetP2_1: P2.1 R30.1 | length 1439.3
  Top Layer w10: v1(2700.32,4349) R30.1@2700.32,4380
  Top Layer w15: P2.1@3792.09,4604.53 3792.09,4499.5 v1(3825.06,4466.52)
  Mid-Layer 1 w10: v1(2700.32,4349) 2800.81,4248.51 3172.13,4248.51 3241.58,4317.96 3437.96,4317.96 3530,4410 3679.46,4410 3735.99,4466.52 v1(3825.06,4466.52)
NetP2_2: P2.2 R28.2 | length 128.3
  Top Layer w15: P2.2@3792.09,4653.74 v1(3858.6,4653.74)
  Bottom Layer w15: R28.2@3840,4599.69 3858.6,4618.29 v1(3858.6,4653.74)
NetP2_3: P2.3 R29.2 | length 194.1
  Top Layer w15: P2.3@3792.09,4702.95 v1(3858.6,4702.95)
  Bottom Layer w15: R29.2@3800,4599.69 3800,4644.35 v1(3858.6,4702.95)
NetQ2_1: Q2.1 R48.2 R49.1 | length 1312.9
  Mid-Layer 1 w10: v1(2439,4707) 2497,4649 2497,4117.5 2771.09,3843.42 v1(2874.91,3843.42)
  Bottom Layer w10: v1(2874.91,3843.42) 2888.58,3829.75 2888.58,3769.86 2918.44,3740 R48.2@2940.32,3740
  Bottom Layer w15: Q2.1@2439,4677 R49.1@2439,4741.63
NetQ3_1: Q3.1 R50.2 R51.1 | length 140.5
  Bottom Layer w15: R51.1@3059.68,3520 R50.2@3120.32,3520 3120.32,3568.89 Q3.1@3098.4,3590.8
NetR3_1: R3.1 U1.8 | length 61
  Top Layer w10: U1.8@3679,4374 R3.1@3679,4435
NetR4_2: R4.2 U3.44 | length 154
  Top Layer w10: U3.44@3147.32,4409.53 3188.53,4409.53 3200,4421 v2(3200,4439)
  Bottom Layer w10: R4.2@3138.37,4480 3179.37,4439 v2(3200,4439)
NetR10_1: R10.1 U2.5 | length 56
  Top Layer w10: U2.5@2702.99,4761.26 R10.1@2759,4761.26
NetR13_2: R13.2 R14.1 U2.6 | length 262.6
  Top Layer w10: U2.6@2702.99,4918.74 2702.99,4927.99 2740,4965 2794,4965 2808.68,4979.69 R13.2@2840,4979.69 2867.36,4979.69 2898.37,5010.7 R14.1@2898.37,5034.43